# Altium PCB 3x3_V2_Pan.PcbDoc
Units mm, origin at the board's own origin, x right, y up, seen from the top; angles counter-clockwise.
Board outline 143.35 x 136 mm, 2 copper layers (Top Layer, Bottom Layer); 22 components, 11 nets, 203 pads, 0 vias.
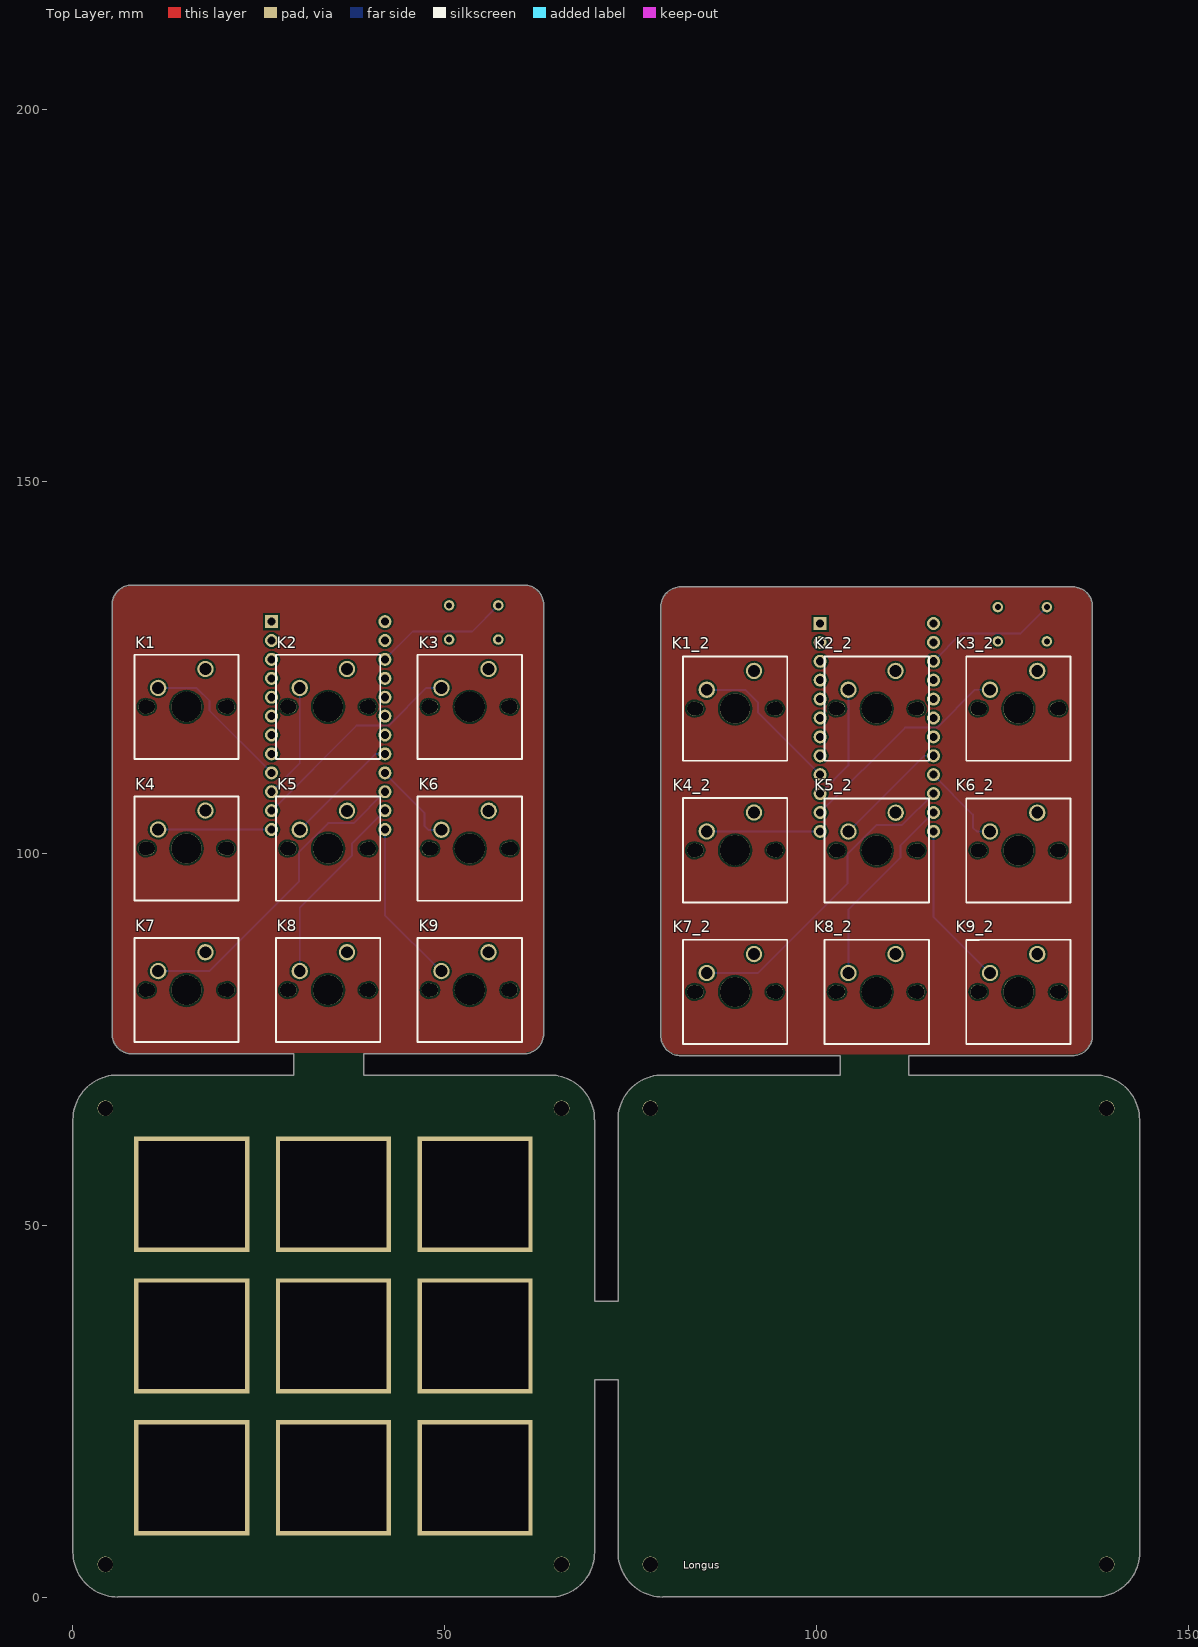
[diagram p0: Top Layer view]
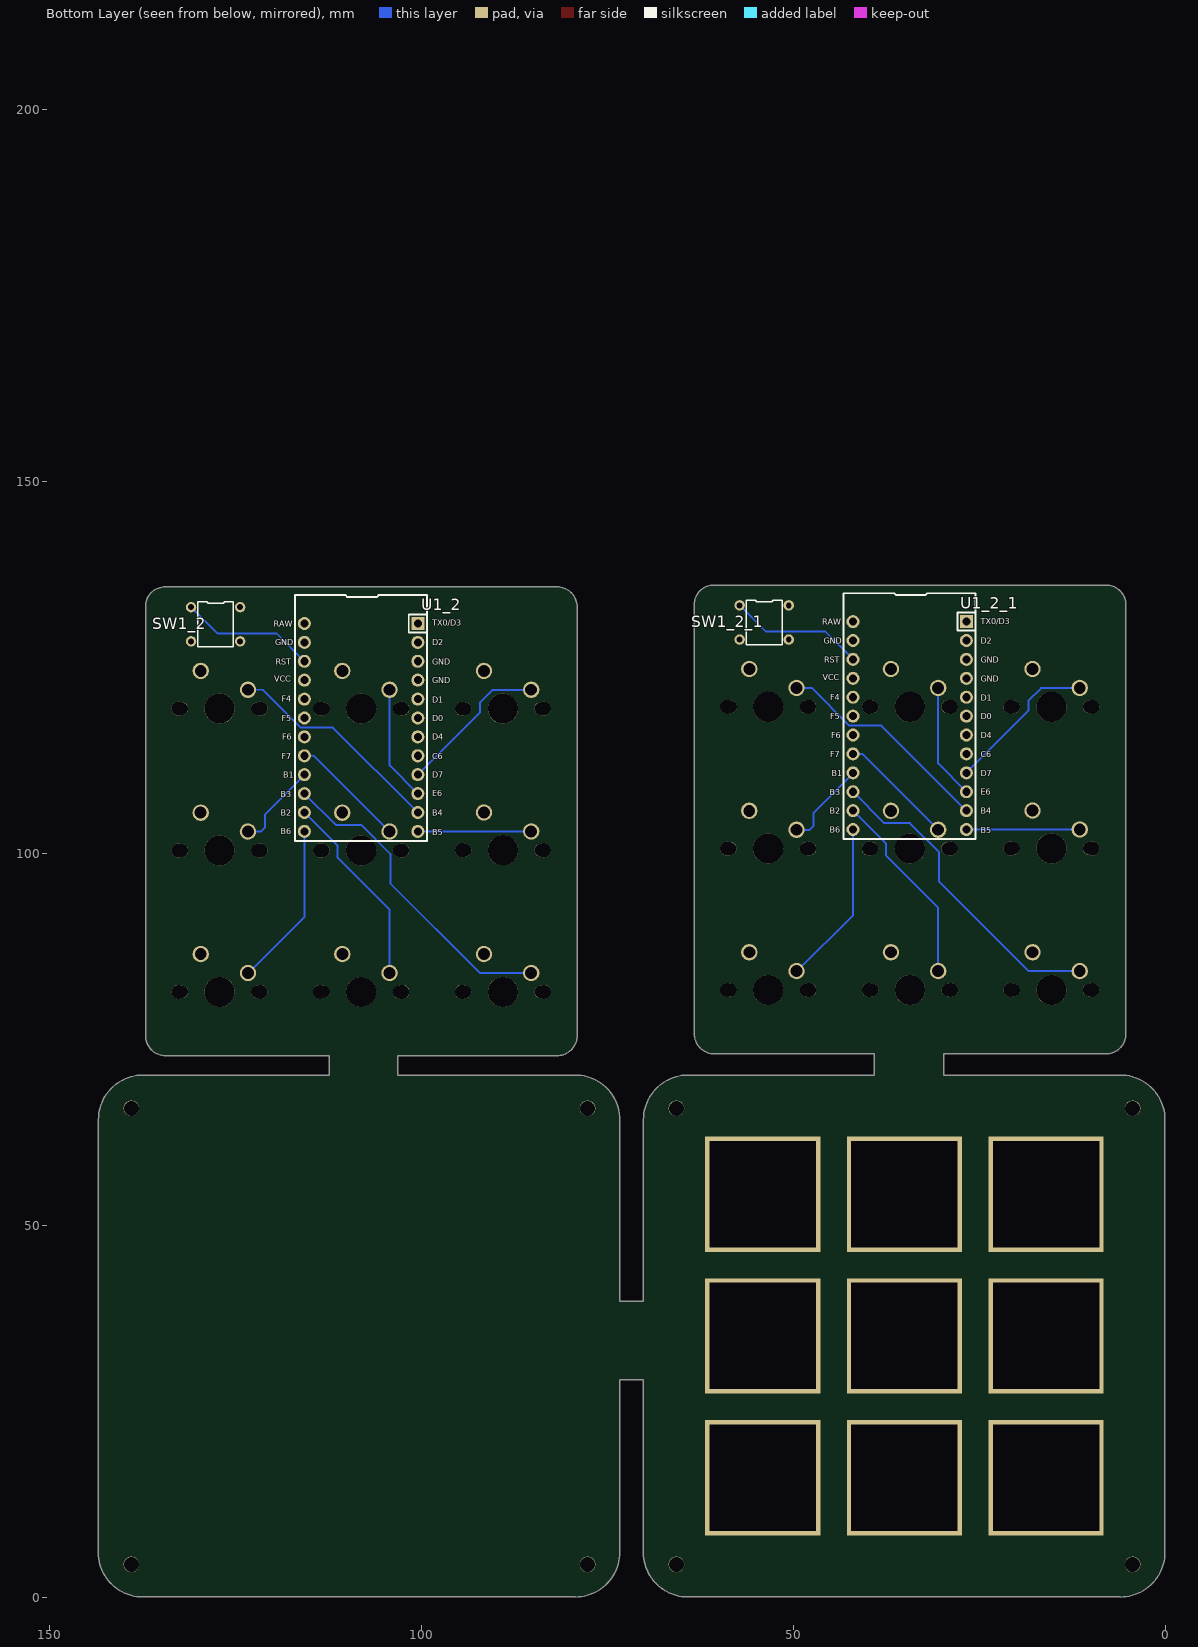
[diagram p1: Bottom Layer view, seen from below]

## Layer stack, top to bottom
Top Solder: solder mask 0.0102, Solder Resist, Dk 3.5
Top Layer: signal copper 0.0356
Dielectric 1: dielectric 0.32, FR-4, Dk 4.8
Bottom Layer: signal copper 0.0356
Bottom Solder: solder mask 0.0102, Solder Resist, Dk 3.5

## Board outline
0.128,6.145 ccw(c6.145,6.145) 6.145,0.127 6.145,0.131 64.23,0.131 ccw(c64.23,6.125) 70.224,6.125 70.225,6.125 70.225,29.325 73.378,29.325 73.378,6.145 ccw(c79.395,6.145) 79.395,0.127 79.395,0.131 137.48,0.131 ccw(c137.48,6.125) 143.474,6.125 143.475,6.125 143.475,12.121 143.468,12.004 143.468,64.281 143.458,64.281 ccw(c137.468,64.281) 137.468,70.271 112.468,70.275 112.468,72.877 134.453,72.877 ccw(c134.453,75.551) 137.127,75.551 137.131,75.55 137.131,133.262 137.127,133.262 ccw(c134.512,133.262) 134.512,135.877 81.801,135.877 ccw(c81.801,133.203) 79.127,133.203 79.127,75.555 ccw(c81.805,75.555) 81.805,72.877 103.25,72.877 103.25,70.276 79.378,70.28 79.377,70.28 ccw(c79.377,64.28) 73.377,64.28 73.378,64.28 73.378,39.85 70.218,39.85 70.218,64.281 70.208,64.281 ccw(c64.218,64.281) 64.218,70.271 64.25,70.275 39.2,70.279 39.2,73.127 60.703,73.127 ccw(c60.703,75.801) 63.377,75.801 63.381,75.8 63.381,133.512 63.377,133.512 ccw(c60.762,133.512) 60.762,136.127 8.051,136.127 ccw(c8.051,133.453) 5.377,133.453 5.377,75.805 ccw(c8.055,75.805) 8.055,73.127 29.825,73.127 29.825,70.276 6.128,70.28 6.127,70.28 ccw(c6.127,64.28) 0.127,64.28 0.128,64.28

## Design rules (kind name [scope] priority, off if disabled: settings)
Clearance [All] p1: gap=0.254 ignorepadtopadclearanceinfootprint=FALSE except(0: Arc-Hole Track-Hole SMDPad-Hole THPad-Hole Via-Hole Fill-Hole Poly-Hole Region-Hole Text-Hole)
PolygonConnect [All] p1: connectstyle=Relief reliefconductorwidth=0.254 reliefentries=4 polygonreliefangle="90 Angle" airgapwidth=0.254
RoutingVias [All] p1: holewidth=0.711 width=1.27 viastyle="Through Hole" minholewidth=0.711 minwidth=1.27 maxholewidth=0.711 maxwidth=1.27
SolderMaskExpansion [All] p1: expansion=0.102 istentingtop=FALSE
Width [All] p1: maxlimit=0.254 minlimit=0.254 preferedwidth=0.254
30 further rules are at their usual default settings.

## Classes and differential pairs
component class Macropadmod: SW?

## Components (designator, comment, footprint, x,y, rotation, side; value= is the part's Value field where it differs from the comment)
K1 "KEYSW-canadian_parts" SOCKET 8.335,112.76 r0 top
K1_2 "KEYSW-canadian_parts" SOCKET 82.06,112.51 r0 top (schematic designator K1)
K2 "KEYSW-canadian_parts" SOCKET 27.365,112.76 r0 top
K2_2 "KEYSW-canadian_parts" SOCKET 101.09,112.51 r0 top (schematic designator K2)
K3 "KEYSW-canadian_parts" SOCKET 46.395,112.76 r0 top
K3_2 "KEYSW-canadian_parts" SOCKET 120.12,112.51 r0 top (schematic designator K3)
K4 "KEYSW-canadian_parts" SOCKET 8.335,93.73 r0 top
K4_2 "KEYSW-canadian_parts" SOCKET 82.06,93.48 r0 top (schematic designator K4)
K5 "KEYSW-canadian_parts" SOCKET 27.371,93.704 r0 top
K5_2 "KEYSW-canadian_parts" SOCKET 101.096,93.454 r0 top (schematic designator K5)
K6 "KEYSW-canadian_parts" SOCKET 46.401,93.704 r0 top
K6_2 "KEYSW-canadian_parts" SOCKET 120.126,93.454 r0 top (schematic designator K6)
K7 "KEYSW-canadian_parts" SOCKET 8.335,74.7 r0 top
K7_2 "KEYSW-canadian_parts" SOCKET 82.06,74.45 r0 top (schematic designator K7)
K8 "KEYSW-canadian_parts" SOCKET 27.365,74.7 r0 top
K8_2 "KEYSW-canadian_parts" SOCKET 101.09,74.45 r0 top (schematic designator K8)
K9 "KEYSW-canadian_parts" SOCKET 46.395,74.7 r0 top
K9_2 "KEYSW-canadian_parts" SOCKET 120.12,74.45 r0 top (schematic designator K9)
SW1_2 "SW_Push" RESET 129.509,127.449 r90 bottom (schematic designator SW1)
SW1_2_1 "SW_Push" RESET 55.784,127.699 r90 bottom (schematic designator SW1)
U1_2 "ProMicro-keebio" PRO-MICRO 115.776,130.959 r180 bottom (schematic designator U1)
U1_2_1 "ProMicro-keebio" PRO-MICRO 42.051,131.209 r180 bottom (schematic designator U1)

## Footprints (in the part's own frame and the unit in brackets; to place one, negate y for a bottom-side part, rotate by r counter-clockwise, add the part's x,y. Pads: shape width x height; smd on the part's side, far side on the other; paste and mask are expansions set on the pad)
PRO-MICRO [mm]
  rect 1.753x1.753 hole 1.092: 1(15.24,0)
  round 1.753 hole 1.092: 2(15.24,-2.54) 3(15.24,-5.08) 4(15.24,-7.62) 5(15.24,-10.16) 6(15.24,-12.7) 7(15.24,-15.24) 8(15.24,-17.78) 9(15.24,-20.32) 10(15.24,-22.86) 11(15.24,-25.4) 12(15.24,-27.94) 13(0,-27.94) 14(0,-25.4) 15(0,-22.86) 16(0,-20.32) 17(0,-17.78) 18(0,-15.24) 19(0,-12.7) 20(0,-10.16) 21(0,-7.62) 22(0,-5.08) 23(0,-2.54) 24(0,0)
  silkscreen extent -1.27,-29.21 16.48,3.81
RESET [mm]
  round 1.4 hole 0.8: 1(5.7,1.5) 2(5.7,-5.1) 3(1.1,1.5) 4(1.1,-5.1)
  silkscreen extent 0.4,-4.2 6.4,0.6
SOCKET [mm]
  round 2.2 hole 1.6: 1(3.24,9.54) 2(9.59,12.08)
  round 1.9 hole 1.9: 3(1.55,7) 3(12.55,7)
  round 1.7 hole 1.7: 3(1.97,7) 3(12.13,7)
  round 4.05 hole 4.05: 3(7.05,7)
  silkscreen extent 0.05,0 14.05,14

## Free pads (board coordinates)
  round 2.1 hole 2: 3(4.48,4.504) 3(4.48,65.804) 3(65.78,4.504) 3(65.78,65.804) 3(65.78,65.804) 3(65.78,65.804) 3(77.73,4.504) 3(77.73,65.804) 3(139.03,4.504) 3(139.03,65.804) 3(139.03,65.804) 3(139.03,65.804)
  rect 15.5x15.5 hole 14.25 square: 4(16.106,16.179) 4(16.106,35.209) 4(16.106,54.239) 4(35.136,16.179) 4(35.136,35.209) 4(35.136,54.239) 4(54.165,16.179) 4(54.165,35.209) 4(54.165,54.239)

## Nets (pads, with @x,y where several pads share a name; then routed paths per layer and width w, separated by ;. In a path a pad name is that pad's centre, name@x,y a point inside that pad or via, vN(x,y) a via of type N, cw(c..) or ccw(c..) an arc to the next point about the centre after c; other vN are vias at no path point)
GND: 
NetK1_1: 
NetK2_1: 
NetK3_1: 
NetK4_1: 
NetK5_1: 
NetK6_1: 
NetK7_1: 
NetK8_1: 
NetK9_1: 
NetSW1_1: 
pads on no net: K1.1 K1.2 K1.3 K1_2.1 K1_2.2 K1_2.3 K2.1 K2.2 K2.3 K2_2.1 K2_2.2 K2_2.3 K3.1 K3.2 K3.3 K3_2.1 K3_2.2 K3_2.3 K4.1 K4.2 K4.3 K4_2.1 K4_2.2 K4_2.3 K5.1 K5.2 K5.3 K5_2.1 K5_2.2 K5_2.3 K6.1 K6.2 K6.3 K6_2.1 K6_2.2 K6_2.3 K7.1 K7.2 K7.3 K7_2.1 K7_2.2 K7_2.3 K8.1 K8.2 K8.3 K8_2.1 K8_2.2 K8_2.3 K9.1 K9.2 K9.3 K9_2.1 K9_2.2 K9_2.3 SW1_2.1 SW1_2.2 SW1_2.3 SW1_2.4 SW1_2_1.1 SW1_2_1.2 SW1_2_1.3 SW1_2_1.4 U1_2.1 U1_2.2 U1_2.3 U1_2.4 U1_2.5 U1_2.6 U1_2.7 U1_2.8 U1_2.9 U1_2.10 U1_2.11 U1_2.12 U1_2.13 U1_2.14 U1_2.15 U1_2.16 U1_2.17 U1_2.18 U1_2.19 U1_2.20 U1_2.21 U1_2.22 U1_2.23 U1_2.24 U1_2_1.1 U1_2_1.2 U1_2_1.3 U1_2_1.4 U1_2_1.5 U1_2_1.6 U1_2_1.7 U1_2_1.8 U1_2_1.9 U1_2_1.10 U1_2_1.11 U1_2_1.12 U1_2_1.13 U1_2_1.14 U1_2_1.15 U1_2_1.16 U1_2_1.17 U1_2_1.18 U1_2_1.19 U1_2_1.20 U1_2_1.21 U1_2_1.22 U1_2_1.23 U1_2_1.24
copper on no net: | length 436.4
  Bottom Layer w0.254: 11.51,103.255 11.575,103.255 11.582,103.262 26.804,103.262 26.811,103.269 ; 11.575,84.24 18.465,84.24 30.482,96.257 30.482,100.218 34.404,104.14 37.842,104.14 42.051,108.349 ; 11.575,122.285 16.765,122.285 18.475,120.575 18.475,119.225 26.811,110.889 ; 26.811,105.809 38.228,117.227 42.547,117.227 47.62,122.3 49.635,122.3 ; 26.811,108.349 30.605,112.143 30.605,122.3 ; 30.605,84.24 30.605,92.755 37.6,99.75 37.6,101.358 42.051,105.809 ; 30.611,103.244 40.796,113.429 42.051,113.429 ; 42.051,103.269 42.051,91.744 49.595,84.2 ; 42.051,110.889 42.051,110.822 47.35,105.522 47.35,103.775 47.896,103.229 49.576,103.229 ; 42.051,126.129 45.802,129.88 53.765,129.88 57.284,133.399 ; 85.235,103.005 85.3,103.005 85.307,103.012 100.529,103.012 100.536,103.019 ; 85.3,83.99 92.19,83.99 104.207,96.007 104.207,99.968 108.129,103.89 111.567,103.89 115.776,108.099 ; 85.3,122.035 90.49,122.035 92.2,120.325 92.2,118.975 100.536,110.639 ; 100.536,105.559 111.953,116.977 116.272,116.977 121.345,122.05 123.36,122.05 ; 100.536,108.099 104.33,111.893 104.33,122.05 ; 104.33,83.99 104.33,92.505 111.325,99.5 111.325,101.108 115.776,105.559 ; 104.336,102.994 114.521,113.179 115.776,113.179 ; 115.776,103.019 115.776,91.494 123.32,83.95 ; 115.776,110.639 115.776,110.572 121.075,105.272 121.075,103.525 121.621,102.979 123.301,102.979 ; 115.776,125.879 119.527,129.63 127.49,129.63 131.009,133.149

## Polygon pours and split planes (outlines as drawn)
no net on Top Layer "NONET_L01_P019" (solid, pour order 19): 8.05,136.025 ccw(c8.05,133.485) 6.254,135.281 5.998,135.025 ccw(c7.205,133.818) 5.498,133.818 5.498,75.525 ccw(c7.309,75.525) 6.028,74.245 6.498,73.775 ccw(c7.705,74.982) 7.705,73.275 60.696,73.275 ccw(c60.696,75.815) 62.492,74.019 62.748,74.275 ccw(c61.541,75.482) 63.248,75.482 63.248,133.473 ccw(c60.708,133.473) 62.504,135.269 62.248,135.525 ccw(c61.041,134.318) 61.041,136.025
no net on Top Layer "NONET_L01_P012" (solid, pour order 12): 55.3,135.675
no net on Top Layer "NONET_L01_P018" (solid, pour order 18): 81.8,135.8 ccw(c81.8,133.26) 80.004,135.056 79.748,134.8 ccw(c80.955,133.593) 79.248,133.593 79.248,75.3 ccw(c81.059,75.3) 79.778,74.02 80.248,73.55 ccw(c81.455,74.757) 81.455,73.05 134.446,73.05 ccw(c134.446,75.59) 136.242,73.794 136.498,74.05 ccw(c135.291,75.257) 136.998,75.257 136.998,133.248 ccw(c134.458,133.248) 136.254,135.044 135.998,135.3 ccw(c134.791,134.093) 134.791,135.8
no net on Top Layer "NONET_L01_P017" (solid, pour order 17): 148.225,79.025
no net on Top Layer "NONET_L01_P016" (solid, pour order 16): 129.5,139.25
no net on Top Layer "NONET_L01_P014" (solid, pour order 14): 156.75,69.504
no net on Top Layer "NONET_L01_P013" (solid, pour order 13): 16.496,69.504
no net on Top Layer "NONET_L01_P007" (solid, pour order 7): 16.5,69.5

## Other copper
Top Layer:
  region: 146.878,207.896

## Silkscreen, mask and mechanical layers (free items; w line width, h text height)
Top Overlay:
  lines w0.254: 46.451,87.325 46.451,88.674 48.168,88.674 ; 120.176,87.075 120.176,88.424 121.893,88.424
  text "Longus" at 82.14,3.911 h1
Mechanical 1:
  lines w0.25: 29.825,70.276 29.825,73.127 ; 39.2,70.279 39.2,73.127 ; 70.218,39.85 73.378,39.85 ; 70.225,29.325 73.378,29.325 ; 103.25,70.276 103.25,72.877 ; 112.468,70.275 112.468,72.85 112.475,72.85
  lines w0.254: 0.127,64.28 cw(c6.127,64.28) 6.127,70.28 ; 0.128,64.28 0.128,6.145 ccw(c6.145,6.145) 6.145,0.127 ; 5.377,75.88 5.377,133.528 cw(c8.051,133.528) 8.051,136.202 60.762,136.202 cw(c60.762,133.587) 63.377,133.587 ; 5.402,75.805 ccw(c8.08,75.805) 8.08,73.127 29.825,73.127 ; 6.128,70.28 29.825,70.276 ; 6.145,0.131 64.23,0.131 ccw(c64.23,6.125) 70.224,6.125 ; 39.2,70.279 64.25,70.275 ; 39.2,73.127 60.728,73.127 ccw(c60.728,75.801) 63.402,75.801 ; 63.381,75.875 63.381,133.587 ; 64.218,70.271 cw(c64.218,64.281) 70.208,64.281 ; 70.218,39.85 70.218,64.281 ; 70.225,6.125 70.225,29.325 ; 73.377,64.28 cw(c79.377,64.28) 79.377,70.28 ; 73.378,29.325 73.378,6.145 ccw(c79.395,6.145) 79.395,0.127 ; 73.378,39.85 73.378,64.28 ; 79.102,75.63 79.102,133.278 cw(c81.776,133.278) 81.776,135.952 134.487,135.952 cw(c134.487,133.337) 137.102,133.337 ; 79.127,75.555 ccw(c81.805,75.555) 81.805,72.877 103.25,72.877 ; 79.378,70.28 103.25,70.276 ; 79.395,0.131 137.48,0.131 ccw(c137.48,6.125) 143.474,6.125 143.475,12.121 ; 112.468,70.275 137.468,70.271 cw(c137.468,64.281) 143.458,64.281 ; 112.475,72.85 112.475,72.877 134.453,72.877 ccw(c134.453,75.551) 137.127,75.551 ; 137.106,75.625 137.106,133.337 ; 143.468,12.004 143.468,64.281

## Text inside footprints (layer, text, board x,y; h text height)
U1_2: Bottom Overlay "F6" at 118.726,115.309 h0.8; Bottom Overlay "GND" at 98.626,125.409 h0.8; Bottom Overlay "RAW" at 119.926,130.509 h0.8; Bottom Overlay "GND" at 119.726,128.009 h0.8; Bottom Overlay "RST" at 119.626,125.409 h0.8; Bottom Overlay "VCC" at 119.826,123.109 h0.8; Bottom Overlay "F4" at 118.826,120.409 h0.8; Bottom Overlay "F5" at 118.826,117.809 h0.8; Bottom Overlay "F7" at 118.826,112.709 h0.8; Bottom Overlay "B1" at 118.626,110.209 h0.8; Bottom Overlay "B3" at 118.926,107.609 h0.8; Bottom Overlay "B2" at 118.926,105.109 h0.8; Bottom Overlay "B6" at 118.926,102.609 h0.8; Bottom Overlay "D2" at 98.626,128.009 h0.8; Bottom Overlay "GND" at 98.626,122.909 h0.8; Bottom Overlay "D1" at 98.626,120.309 h0.8; Bottom Overlay "D0" at 98.626,117.809 h0.8; Bottom Overlay "D4" at 98.626,115.309 h0.8; Bottom Overlay "C6" at 98.626,112.709 h0.8; Bottom Overlay "D7" at 98.626,110.209 h0.8; Bottom Overlay "TX0/D3" at 98.626,130.623 h0.8; Bottom Overlay "E6" at 98.626,107.709 h0.8; Bottom Overlay "B4" at 98.626,105.109 h0.8; Bottom Overlay "B5" at 98.626,102.509 h0.8
U1_2_1: Bottom Overlay "F6" at 45.001,115.559 h0.8; Bottom Overlay "GND" at 24.901,125.659 h0.8; Bottom Overlay "RAW" at 46.201,130.759 h0.8; Bottom Overlay "GND" at 46.001,128.259 h0.8; Bottom Overlay "RST" at 45.901,125.659 h0.8; Bottom Overlay "VCC" at 46.101,123.359 h0.8; Bottom Overlay "F4" at 45.101,120.659 h0.8; Bottom Overlay "F5" at 45.101,118.059 h0.8; Bottom Overlay "F7" at 45.101,112.959 h0.8; Bottom Overlay "B1" at 44.901,110.459 h0.8; Bottom Overlay "B3" at 45.201,107.859 h0.8; Bottom Overlay "B2" at 45.201,105.359 h0.8; Bottom Overlay "B6" at 45.201,102.859 h0.8; Bottom Overlay "D2" at 24.901,128.259 h0.8; Bottom Overlay "GND" at 24.901,123.159 h0.8; Bottom Overlay "D1" at 24.901,120.559 h0.8; Bottom Overlay "D0" at 24.901,118.059 h0.8; Bottom Overlay "D4" at 24.901,115.559 h0.8; Bottom Overlay "C6" at 24.901,112.959 h0.8; Bottom Overlay "D7" at 24.901,110.459 h0.8; Bottom Overlay "TX0/D3" at 24.901,130.873 h0.8; Bottom Overlay "E6" at 24.901,107.959 h0.8; Bottom Overlay "B4" at 24.901,105.359 h0.8; Bottom Overlay "B5" at 24.901,102.759 h0.8